# EAGLE board io2 (EAGLE 7.7.0)
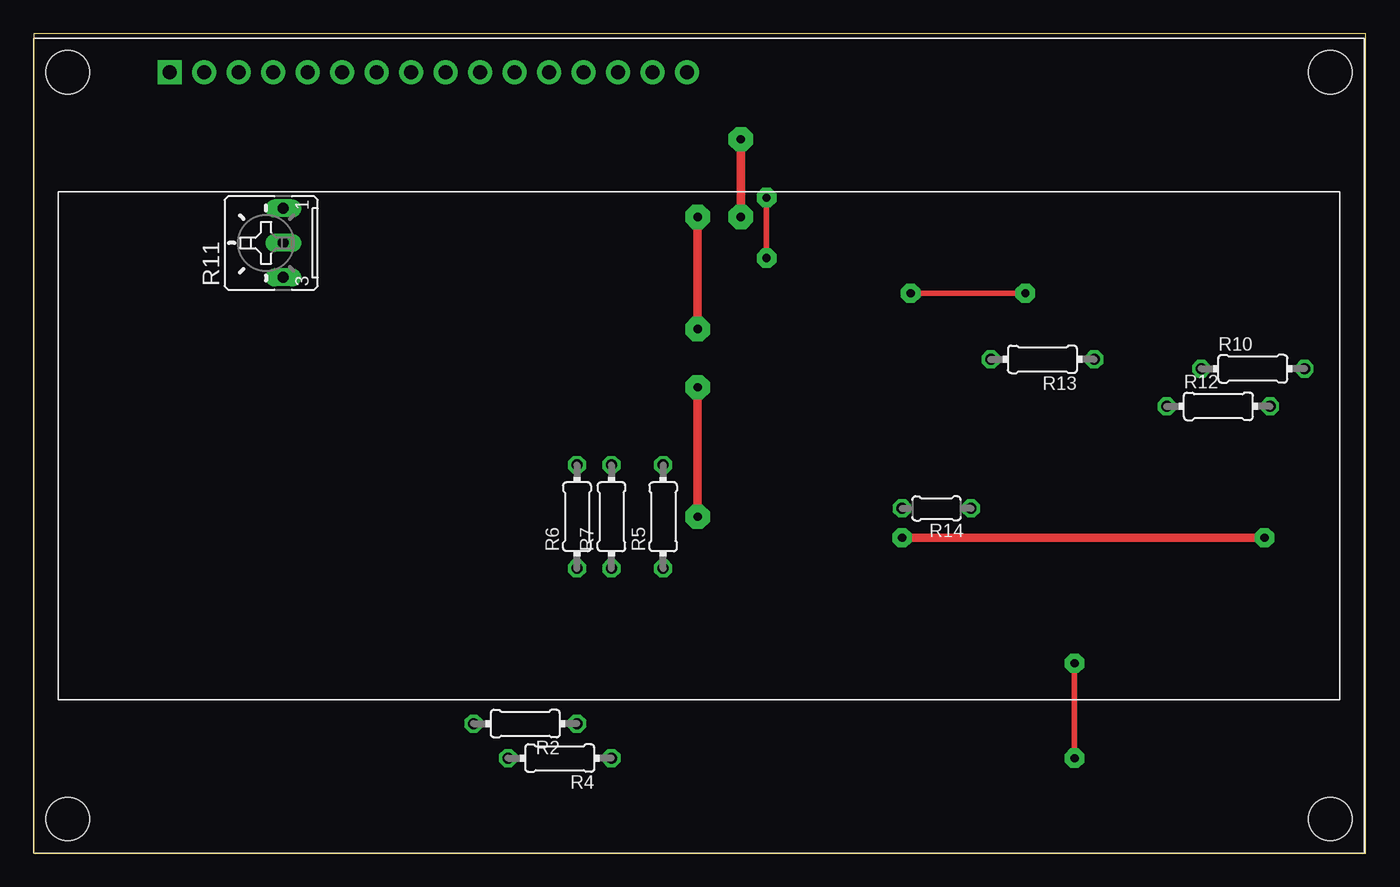
[diagram p0: board, top side]
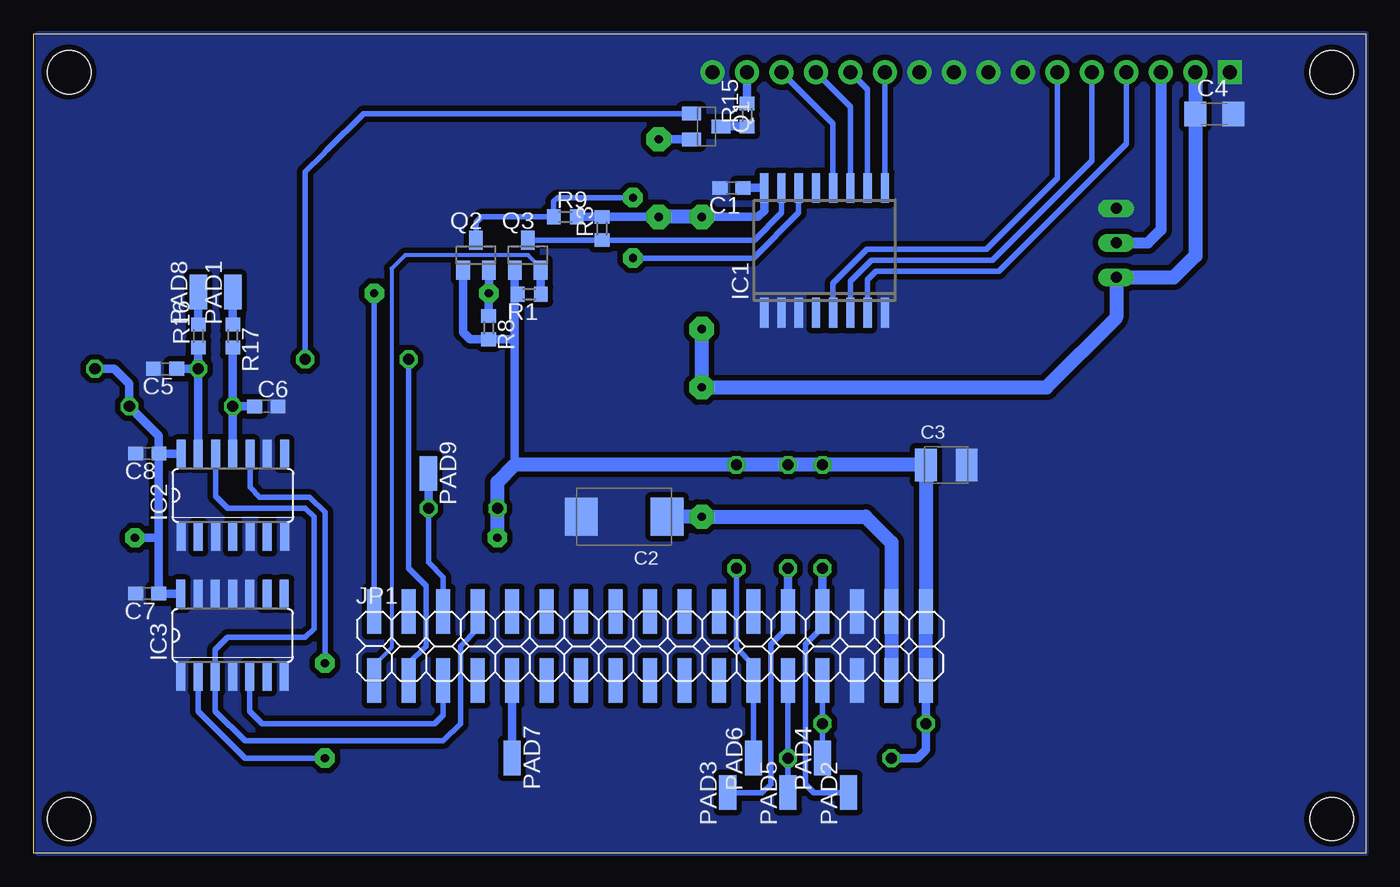
[diagram p1: board, bottom side, seen from below]

Size 98.09 x 60.31 mm. Coordinates in mm from the lower left corner, seen from the top.
Outline: 0,0 98.09,0 98.09,60.31 0,60.31 0,0
Copper layers (1*16): Top 0.035mm / dielectric 1.5mm / Bottom 0.035mm
Design rules "default *": minimum track width 10mil, minimum drill 24mil, track to track 8mil, track to pad 8mil, pad to pad 8mil, via to via 8mil, smd to smd 8mil, copper to edge 0mil, drill to drill 8mil, minimum pad ring 10mil, minimum via ring 8mil, stop-mask expansion 4mil, vias tented up to drill 0mil, thermal gap 10mil

## Footprints (pad centres in the part's own frame; a part is rotated, then mirrored left to right if it is on the bottom)
C0603 = smd 1.1 x 1: 1 -0.85,0; 2 0.85,0
SMC_D = smd 2.4 x 2.8: + -3.15,0; - 3.15,0
SMC_B = smd 1.6 x 2.4: + -1.5,0; - 1.5,0
C1206 = smd 1.6 x 1.8: 1 -1.4,0; 2 1.4,0
SO16W = smd 0.6 x 2.2: 1 -4.445,-4.6; 2 -3.175,-4.6; 3 -1.905,-4.6; 4 -0.635,-4.6; 5 0.635,-4.6; 6 1.905,-4.6; 7 3.175,-4.6; 8 4.445,-4.6; 9 4.445,4.6; 10 3.175,4.6; 11 1.905,4.6; 12 0.635,4.6; 13 -0.635,4.6; 14 -1.905,4.6; 15 -3.175,4.6; 16 -4.445,4.6
SO14 = smd 0.66 x 2.032: 1 -3.81,-3.073; 2 -2.54,-3.073; 3 -1.27,-3.073; 4 0,-3.073; 5 1.27,-3.073; 6 2.54,-3.073; 7 3.81,-3.073; 8 3.81,3.073; 9 2.54,3.073; 10 1.27,3.073; 11 0,3.073; 12 -1.27,3.073; 13 -2.54,3.073; 14 -3.81,3.073
2X17SMD = smd 1.016 x 3.302: 1 -1.27,-3.81; 2 -1.27,1.27; 3 1.27,-3.81; 4 1.27,1.27; 5 3.81,-3.81; 6 3.81,1.27; 7 6.35,-3.81; 8 6.35,1.27; 9 8.89,-3.81; 10 8.89,1.27; 11 11.43,-3.81; 12 11.43,1.27; 13 13.97,-3.81; 14 13.97,1.27; 15 16.51,-3.81; 16 16.51,1.27; 17 19.05,-3.81; 18 19.05,1.27; 19 21.59,-3.81; 20 21.59,1.27; 21 24.13,-3.81; 22 24.13,1.27; 23 26.67,-3.81; 24 26.67,1.27; 25 29.21,-3.81; 26 29.21,1.27; 27 31.75,-3.81; 28 31.75,1.27; 29 34.29,-3.81; 30 34.29,1.27; 31 36.83,-3.81; 32 36.83,1.27; 33 39.37,-3.81; 34 39.37,1.27
SMD1,27-2,54 = smd 1.27 x 2.54: 1 0,0
SOT23-BEC = smd 1 x 1.4: B -0.95,-1.1; C 0,1.1; E 0.95,-1.1
SOT23 = smd 1 x 1.4: 1 -0.95,-1.1; 2 0.95,-1.1; 3 0,1.1
R0603 = smd 1 x 1.1: 1 -0.85,0; 2 0.85,0
0204/7 = drill 0.813 octagon: 1 -3.81,0; 2 3.81,0
B25U = drill 0.813 long: A 2.54,-0.889; E -2.54,-0.889; S 0,-0.889
0204/5 = drill 0.813 octagon: 1 -2.54,0; 2 2.54,0
LCD-20X4-4HOLES = drill 1.016 pad 1.778 square: P$1 10,57.5 | drill 1.016 pad 1.778: P$2 12.54,57.5; P$3 15.08,57.5; P$4 17.62,57.5; P$5 20.16,57.5; P$6 22.7,57.5; P$7 25.24,57.5; P$8 27.78,57.5; P$9 30.32,57.5; P$10 32.86,57.5; P$11 35.4,57.5; P$12 37.94,57.5; P$13 40.48,57.5; P$14 43.02,57.5; P$15 45.56,57.5; P$16 48.1,57.5 | hole 3.2: 2.5,2.5; 2.5,57.5; 95.5,57.5; 95.5,2.5

## Placement (x,y rotation side)
C1  [C0603]  46.71,48.97 180 bottom
C2  [SMC_D]  54.61,24.77 180 bottom
C3  [SMC_B]  30.89,28.57 0 bottom
C4  [C1206]  11.14,54.43 0 bottom
C5  [C0603]  88.44,35.66 180 bottom
C6  [C0603]  80.98,32.89 0 bottom
C7  [C0603]  89.76,19.1 180 bottom
C8  [C0603]  89.74,29.41 180 bottom
IC1  PCF8574T  [SO16W]  39.85,44.37 0 bottom
IC2  74HC14D  [SO14]  83.44,26.34 0 bottom
IC3  74HC74D  [SO14]  83.46,16.03 0 bottom
JP1  [2X17SMD]  71.75,16.51 0 bottom
PAD1  [SMD1,27-2,54]  83.44,41.3 0 bottom
PAD2  [SMD1,27-2,54]  38.1,4.45 0 bottom
PAD3  [SMD1,27-2,54]  46.99,4.45 0 bottom
PAD4  [SMD1,27-2,54]  40.01,6.99 0 bottom
PAD5  [SMD1,27-2,54]  42.55,4.45 0 bottom
PAD6  [SMD1,27-2,54]  45.09,6.99 0 bottom
PAD7  [SMD1,27-2,54]  62.87,6.99 180 bottom
PAD8  [SMD1,27-2,54]  85.98,41.3 0 bottom
PAD9  [SMD1,27-2,54]  69.04,27.94 180 bottom
Q1  BC857BSMD  [SOT23-BEC]  48.56,53.5 270 bottom
Q2  BSS123  [SOT23]  65.53,44.03 0 bottom
Q3  BSS123  [SOT23]  61.72,44.03 0 bottom
R1  4k7  [R0603]  61.59,41.15 180 bottom
R2  [0204/7]  36.2,9.53 180 top
R3  4k7  [R0603]  56.25,45.99 90 bottom
R4  [0204/7]  38.73,6.99 180 top
R5  [0204/7]  46.35,24.77 90 top
R6  [0204/7]  40.01,24.77 90 top
R7  [0204/7]  42.55,24.77 90 top
R8  4k7  [R0603]  64.59,38.68 270 bottom
R9  4k7  [R0603]  58.95,46.84 0 bottom
R10  [0204/7]  89.79,35.66 0 top
R11  [B25U]  17.48,44.92 90 top
R12  [0204/7]  87.25,32.89 0 top
R13  [0204/7]  74.3,36.35 180 top
R14  [0204/5]  66.48,25.37 180 top
R15  [R0603]  45.56,54.35 90 bottom
R16  [R0603]  85.98,38.07 90 bottom
R17  [R0603]  83.44,38.07 270 bottom
U$1  LCD-HD447804-HOLES20X4-4HOLES  [LCD-20X4-4HOLES]  0,0 0 top

## Library data of the parts
C1-C8 R1-R10 R12-R17 = rcl
IC1 = micro-philips; MPN: PCF8574T/3,512; OC_FARNELL: 1201255; OC_NEWARK: 70R6870
IC2 IC3 = 74xx-eu
JP1 = pinhead-2
PAD1-PAD9 = wirepad
Q1 = transistor-pnp
Q2 Q3 = transistor-small-signal
R11 = pot
U$1 = HD44780LCD

## Nets
3V: C3.+ C7.1 C8.1 IC2.14 IC3.14 JP1.33 JP1.34 Q2.1 Q3.1 R1.2 R2.2 R4.2 R5.2 R6.2 R7.2 R8.2 R10.2 R12.2 R14.2
5V: C1.1 C2.+ C4.1 IC1.16 JP1.31 JP1.32 Q1.E R3.2 R9.2 R11.E U$1.P$2
BACKLIGHT: JP1.3 R13.2
D4: IC1.9 U$1.P$11
D5: IC1.10 U$1.P$12
D6: IC1.11 U$1.P$13
D7: IC1.12 U$1.P$14
GND: C1.2 C2.- C3.- C4.2 C5.2 C6.2 C7.2 C8.2 IC1.1 IC1.2 IC1.3 IC1.8 IC2.1 IC2.3 IC2.5 IC2.7 IC2.9 IC3.1 IC3.4 IC3.7 IC3.10 IC3.11 IC3.12 IC3.13 JP1.29 JP1.30 R11.A U$1.P$1 U$1.P$7 U$1.P$8 U$1.P$9 U$1.P$10 U$1.P$16
IR_DATA: JP1.9 PAD7.1
LCD_EN: IC1.5 U$1.P$6
N$1: Q1.C R15.1
N$3: R15.2 U$1.P$15
N$5: PAD8.1 R16.2
N$6: Q1.B R13.1
N$7: PAD1.1 R17.1
N$14: R11.S U$1.P$3
ROT_A_DT: C5.1 IC2.13 R10.1 R16.1
ROT_B_: IC2.10 IC3.2
ROT_B_CLK: C6.1 IC2.11 R12.1 R17.2
ROT_DIR: IC3.5 JP1.5
ROT_STEP: IC2.12 IC3.3 JP1.8
ROT_SW: JP1.6 PAD9.1 R14.1
RS: IC1.7 U$1.P$4
RW: IC1.6 U$1.P$5
S1: JP1.27 PAD4.1 R2.1
S2: JP1.28 PAD2.1 R6.1
S3: JP1.25 PAD5.1 R4.1
S4: JP1.26 PAD3.1 R7.1
S5: JP1.23 PAD6.1 R5.1
SCL_3V: JP1.2 Q2.2 R8.1
SCL_5V: IC1.14 Q2.3 R9.1
SDA_3V: JP1.1 Q3.2 R1.1
SDA_5V: IC1.15 Q3.3 R3.1

## Tracks (layer width: path | path; a pad name or v marks a point on that pad's centre or on a via)
3V  (via drill 0.6 pad 1.42)
  Top 0.61: v63.96,23.22 v90.65,23.22
  Bottom 0.406: R1.2 62.55,41.15
  Bottom 0.61: 62.67,37.83 62.67,41.27 | 62.67,41.27 Q3.1 | 62.55,41.15 62.67,41.27 | 62.67,37.83 R8.2 65.98,37.83 66.48,38.34 Q2.1 | JP1.33 R2.2 32.38,7.62 33.02,6.99 R4.2 | 62.67,28.57 62.67,37.83 | IC3.14 C7.1 88.91,23.22 | C8.1 88.91,29.39 88.91,23.5 88.91,23.22 | C8.1 IC2.14 | C8.1 88.89,30.72 R12.2 91.06,34.54 92.18,35.66 R10.2 | v90.65,23.22 88.91,23.22
  Bottom 1.016: JP1.33 JP1.34 C3.+ R6.2 R7.2 R5.2 62.67,28.57 63.94,27.3 R14.2 63.96,25.36 v63.96,23.22
5V  (via drill 0.6 pad 1.78)
  Top 0.61: v48.9,24.77 v48.9,34.29 | v48.9,38.58 v48.9,46.84 | v52.07,46.84 v52.07,52.55
  Bottom 0.61: R9.2 R3.2 v52.07,46.84 | v48.9,46.84 44.76,46.84 44.3,47.3 IC1.16 C1.1 | Q1.E 51.43,52.55 v52.07,52.55
  Bottom 1.016: JP1.31 JP1.32 34.92,22.86 36.83,24.77 v48.9,24.77 C2.+ | v48.9,38.58 v48.9,34.29 23.5,34.29 18.36,39.42 R11.E 14.13,42.38 12.54,43.98 C4.1 U$1.P$2 | v48.9,46.84 v52.07,46.84
BACKLIGHT
  Bottom 0.406: JP1.3 70.48,13.97 69.22,15.24 69.22,19.68 70.48,20.95 R13.2
D4
  Bottom 0.406: IC1.9 U$1.P$11
D5
  Bottom 0.406: IC1.10 36.68,56.24 U$1.P$12
D6
  Bottom 0.406: IC1.11 37.95,54.97 U$1.P$13
D7
  Bottom 0.406: IC1.12 39.22,53.7 U$1.P$14
GND
  pour Bottom (isolate 0.406, no thermals): 0,60.33 0,0 97.79,0 97.79,60.33
IR_DATA
  Bottom 0.61: PAD7.1 JP1.9
LCD_EN
  Bottom 0.406: U$1.P$6 22.7,49.69 27.94,44.45 36.73,44.45 39.22,41.96 IC1.5
N$1
  Bottom 0.61: Q1.C R15.1
N$3
  Bottom 0.61: R15.2 U$1.P$15
  Bottom 0.813: U$1.P$15
N$5
  Bottom 0.61: R16.2 PAD8.1
N$6
  Bottom 0.406: Q1.B 73.82,54.45 76.52,51.75 76.83,51.44 78.11,50.16 R13.1
N$7
  Bottom 0.61: R17.1 PAD1.1
N$14
  Bottom 0.813: U$1.P$3 15.08,45.88 16.04,44.92 R11.S
ROT_A_DT
  Bottom 0.61: IC2.13 R10.1 | R10.1 C5.1 | R10.1 R16.1
ROT_B_  (via drill 0.6 pad 1.42)
  Top 0.406: v76.66,6.99 v76.66,13.97
  Bottom 0.406: IC3.2 86,10.44 82.55,6.99 v76.66,6.99 | IC2.10 82.17,26.92 81.46,26.21 77.78,26.21 76.66,25.09 v76.66,13.97
ROT_B_CLK
  Bottom 0.61: IC2.11 R12.1 | C6.1 R12.1 | R12.1 R17.2
ROT_DIR
  Bottom 0.406: JP1.5 67.94,10.16 68.58,9.53 81.28,9.53 82.19,10.44 IC3.5
ROT_STEP
  Bottom 0.305: JP1.8 65.41,16.51
  Bottom 0.406: 65.41,16.51 66.67,15.24 66.67,9.53 67.94,8.26 82.55,8.26 84.73,10.44 IC3.3 84.73,14.96 83.82,15.88 78.11,15.88 77.47,16.51 77.47,24.77 78.11,25.4 83.82,25.4 84.71,26.29 IC2.12
ROT_SW
  Bottom 0.406: R14.1 69.03,21.4 67.94,20.32 JP1.6
  Bottom 0.61: R14.1 69.03,27.93 PAD9.1
RS
  Bottom 0.406: U$1.P$4 17.62,52.23 27.03,42.82 36.07,42.82 36.68,42.22 IC1.7
RW
  Bottom 0.406: U$1.P$5 20.16,50.96 27.48,43.64 36.4,43.64 37.95,42.09 IC1.6
S1
  Bottom 0.406: JP1.27 R2.1 PAD4.1
S2
  Bottom 0.406: JP1.28 40.01,16.64 41.27,15.37 41.27,5.08 40.64,4.45 PAD2.1
  Bottom 0.61: JP1.28 R6.1
S3
  Bottom 0.406: PAD5.1 R4.1 JP1.25
S4
  Bottom 0.406: JP1.26 42.55,16.64 43.81,15.37 43.81,5.08 44.45,4.45 PAD3.1
  Bottom 0.61: JP1.26 R7.1
S5
  Bottom 0.406: R5.1 46.35,15.11 45.09,13.84 JP1.23 PAD6.1
SCL_3V  (via drill 0.6 pad 1.42)
  Top 0.406: v64.58,41.22 v73.03,41.22
  Bottom 0.305: Q2.2 64.58,43.12
  Bottom 0.406: JP1.2 v73.03,41.22
  Bottom 0.61: Q2.2 v64.58,41.22 64.59,41.21 R8.1
SCL_5V  (via drill 0.6 pad 1.42)
  Top 0.406: v53.98,43.81 v53.98,48.26
  Bottom 0.406: IC1.14 41.76,47.14 45.09,43.81 v53.98,43.81 | v53.98,48.26 59.54,48.26 59.8,47.99 R9.1 65.13,46.84 65.53,46.43 Q2.3
SDA_3V
  Bottom 0.305: Q3.2 60.77,43.12 61.68,44.03 70.75,44.03 71.75,43.03 71.75,15.11 73.03,13.84 JP1.1
  Bottom 0.61: R1.1 60.77,41.17 Q3.2
SDA_5V
  Bottom 0.406: Q3.3 R3.1 45.03,45.14 43.03,47.14 IC1.15